# Altium PCB VNA_CHANNEL4.PcbDoc (part 2 of 3)
Units mm, origin at the board's own origin, x right, y up, seen from the top; angles counter-clockwise.
Board outline 32.68 x 75 mm, 4 copper layers (Top Layer, GND, PWR, Bottom Layer), stack 0.758 mm thick; 212 components, 188 nets, 838 pads, 877 vias.
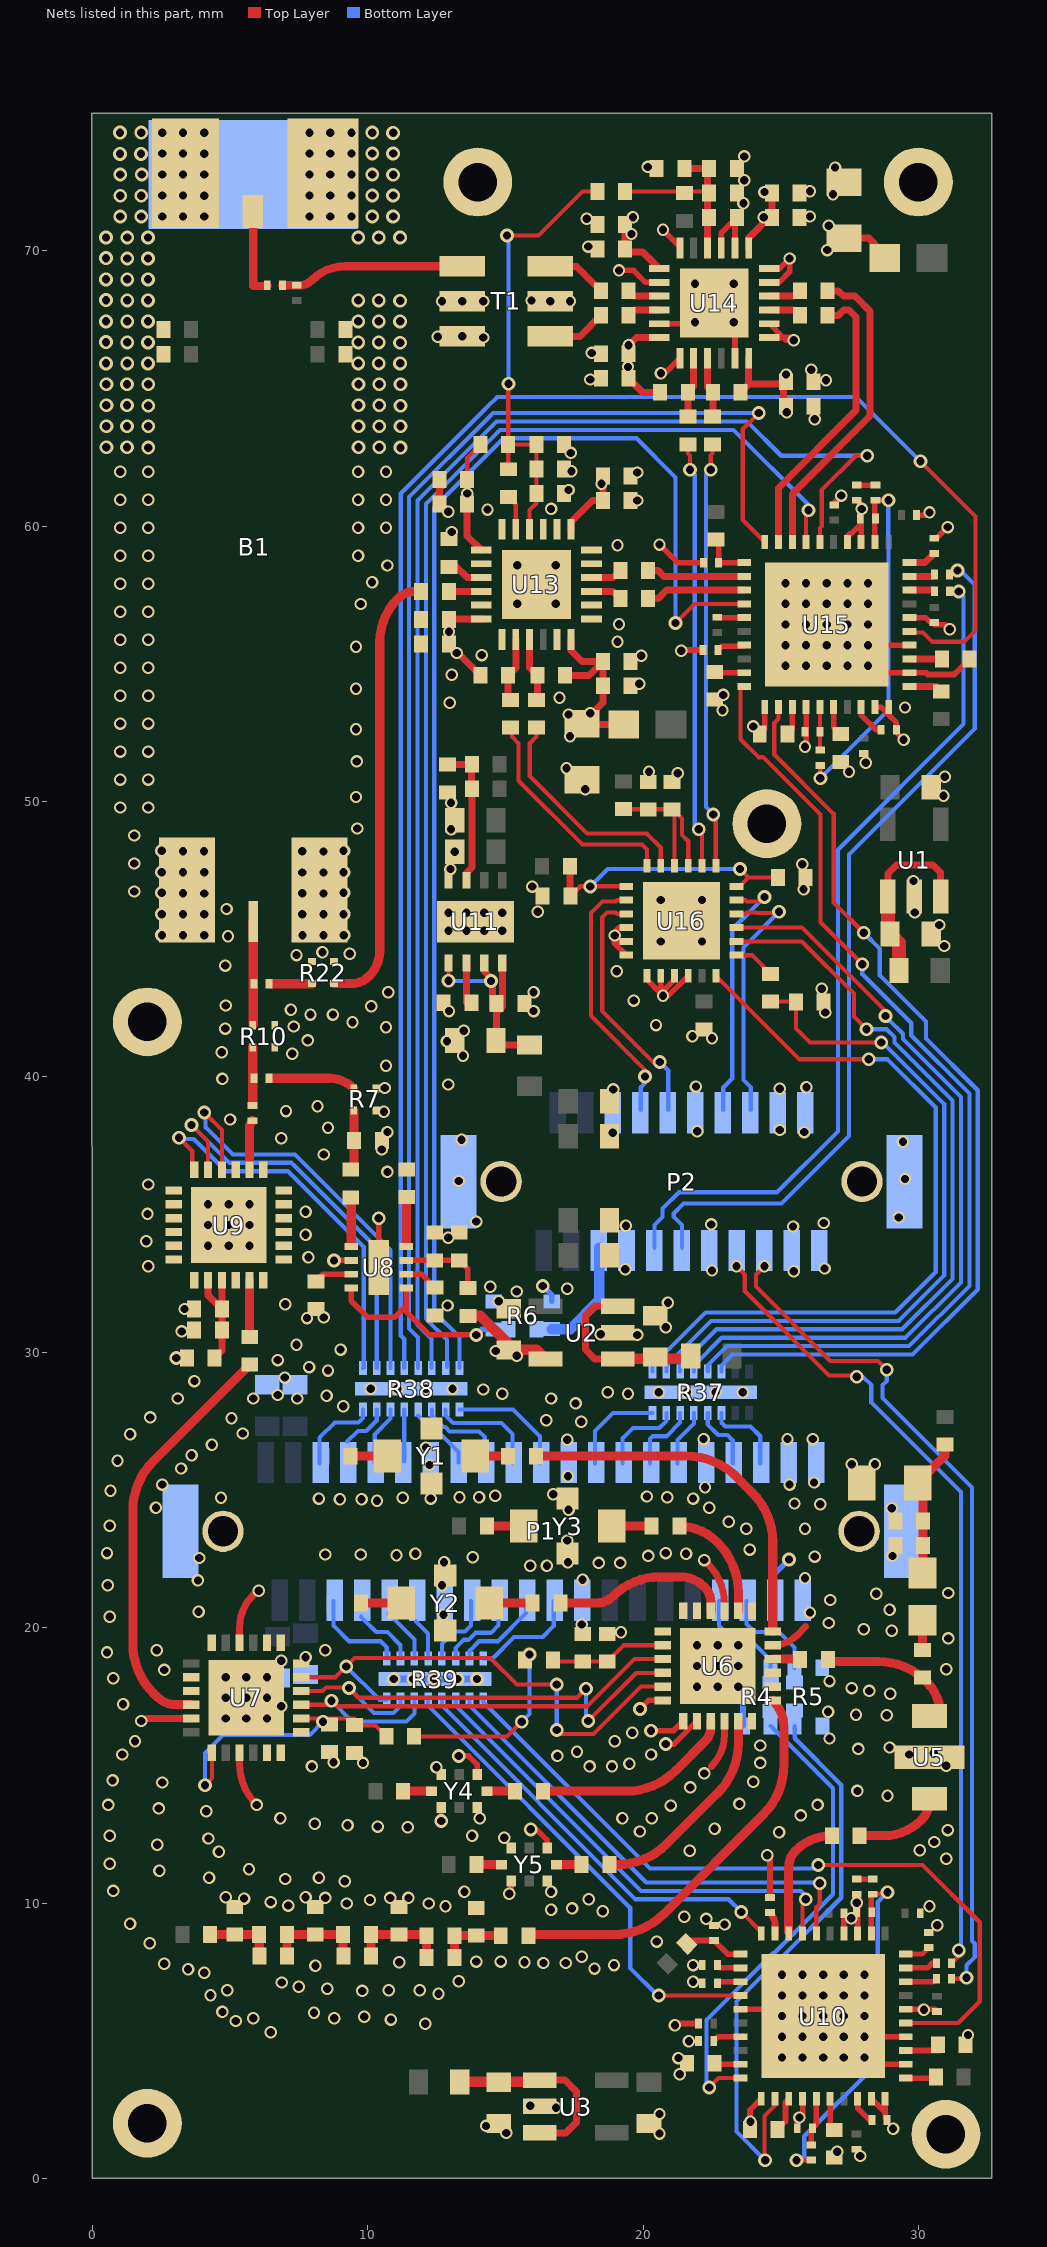
[diagram p4: the nets of this part, all layers, seen from the top]

## Via types
v1: diameter 0.45, hole 0.3, Top Layer to Bottom Layer, tented both sides, 519 vias
v2: diameter 0.5, hole 0.3, Top Layer to Bottom Layer, tented both sides, 143 vias
v3: diameter 0.5, hole 0.305, Top Layer to Bottom Layer, tented both sides, 140 vias
v4: diameter 0.45, hole 0.3, Top Layer to Bottom Layer, 67 vias
v5: diameter 0.508, hole 0.305, Top Layer to Bottom Layer, tented both sides, 8 vias

## Nets (pads, with @x,y where several pads share a name; then routed paths per layer and width w, separated by ;. In a path a pad name is that pad's centre, name@x,y a point inside that pad or via, vN(x,y) a via of type N, cw(c..) or ccw(c..) an arc to the next point about the centre after c; other vN are vias at no path point) (continued)
GND: B1.GND C1.1 C2.1 C3.1 C4.1 C5.1 C6.1 C7.1 C8.1 C9.1 C10.1 C11.1 C12.1 C13.1 C14.1 C15.1 C17.2 C18.2 C22.1 C27.1 C32.1 C36.1 C37.1 C38.1 C40.1 C41.1 C42.1 C44.1 C45.1 C46.2 C48.1 C49.1 C50.1 C52.1 C53.1 C55.1 C56.1 C57.2 C58.2 C59.2 C60.2 C61.2 C62.2 C63.2 C64.2 C66.2 C70.1 C79.1 C80.1 C81.1 C82.1 C83.1 C84.1 C85.1 C86.1 C87.1 C88.1 C89.1 C90.1 C91.1 C92.1 C93.1 C94.1 C95.1 C96.1 C97.1 C98.1 C99.1 C100.1 C101.1 C102.1 C103.1 C105.1 C106.1 C108.1 C109.1 C110.2 C111.2 C112.2 C113.2 C114.2 C115.2 C116.2 C117.2 C118.2 C119.1 C120.1 C122.1 C123.1 C124.1 C125.1 C126.1 C127.1 C128.1 C129.1 C130.1 FB7.1 FB8.1 FB9.1 P1.0 P1.7 P1.12 P1.17 P1.20 P1.21 P1.22 P1.23 P1.30 P1.35 P2.0 P2.1 P2.2 P2.5 P2.8 P2.14 P2.17 P2.20 P2.21 pad.1 R4.3 R5.3 R6.3 R7.1 R7.2 R8.2 R10.1 R10.2 R11.2 R17.1 R19.1 R22.1 R22.2 R25.1 R26.2 R35.2 R37.0 R38.0 R39.0 T1.1 T1.2 T1.5 U1.2 U2.2 U3.2 U5.2 U6.0 U6.1 U6.3 U6.5 U6.6 U6.7 U6.12 U6.13 U6.14 U6.16 U6.18 U6.20 U6.21 U6.23 U7.0 U7.3 U7.5 U7.6 U7.7 U7.12 U7.13 U7.14 U7.16 U7.18 U7.20 U7.21 U7.23 U8.0 U8.2 U9.0 U9.1 U9.4 U9.6 U9.7 U9.8 U9.9 U9.10 U9.11 U9.12 U9.13 U9.15 U9.19 U9.20 U9.21 U9.22 U9.23 U9.24 U10.0 U10.2 U10.4 U10.6 U10.13 U10.14 U10.25 U10.31 U10.34 U10.39 U10.40 U11.0 U11.4 U13.0 U13.1 U13.2 U13.5 U13.6 U13.8 U13.9 U13.12 U13.14 U13.17 U13.19 U13.23 U14.0 U14.1 U14.2 U14.5 U14.6 U14.8 U14.9 U14.12 U14.14 U14.17 U14.19 U14.23 U15.0 U15.2 U15.4 U15.6 U15.13 U15.14 U15.25 U15.31 U15.34 U15.39 U15.40 U16.0 U16.4 U16.5 U16.6 U16.7 U16.8 U16.9 U16.10 Y1.3 Y1.4 Y2.3 Y2.4 Y3.3 Y3.4 Y4.1 Y4.3 Y4.5 Y4.7 Y5.1 Y5.3 Y5.5 Y5.7 | length 82.1
  Top Layer w0.203: v2(8.776,33.337) U8.2@9.405,33.337 ; U8.0@10.405,33.087 v2(10.405,34.865) ; v2(12.676,12.978) Y4.1@12.676,13.462 ; v2(13.309,15.342) 13.665,15.342 13.976,15.031 Y4.5@13.976,14.662 ; v1@15.216,10.416 Y5.1@15.216,10.795 ; v2(15.926,12.675) 16.129,12.675 16.516,12.287 Y5.5@16.516,11.995 ; v1(19.126,69.291) 19.659,69.291 20.095,68.856 U14.14@20.59,68.856 ; U16.6@19.394,44.423 18.948,44.868 v1@18.948,45.085 ; U16.5@19.394,44.923 19.111,44.923 v1@18.948,45.085 ; U16.4@19.394,45.423 19.133,45.423 18.974,45.263 v1(18.974,45.136) 18.974,45.11 v1@18.948,45.085 ; v2(19.888,17.043) 20.203,17.359 U6.12@20.712,17.359 ; U16.7@20.144,43.673 20.144,43.534 v1@20.644,43.034 ; v2(20.294,16.256) 21.109,16.256 U6.13@21.462,16.609 ; U14.17@20.59,67.356 U14.0@21.84,67.356 ; v1(20.599,59.334) 21.255,58.679 C111.2@22.198,58.679 ; U16.8@20.644,43.673 v1@20.644,43.034 ; v1(20.65,65.557) 20.792,65.557 U14.19@21.34,66.106 ; v1(20.726,70.764) 21.34,70.151 U14.12@21.34,70.106 ; v2(20.828,15.773) 21.127,15.773 U6.14@21.962,16.609 ; U16.9@21.144,43.673 21.144,43.534 v1@20.644,43.034 ; v1@21.222,5.626 C63.2@22.018,5.626 ; v1@21.417,55.504 C108.1@22.172,55.504 ; U16.10@21.644,43.673 20.923,42.951 v1(20.726,42.951) v1@20.644,43.034 ; C118.2@22.714,56.681 U15.25@23.673,56.681 ; U14.9@22.84,70.106 22.84,70.65 R19.1@23.34,71.15 ; U14.23@23.34,66.106 U14.0@23.34,67.356 ; U14.8@23.34,70.106 R19.1@23.34,71.15 ; R19.1@23.406,71.216 R19.1@23.34,71.15 ; U10.25@23.544,6.143 U10.0@26.294,6.143 ; C56.1@23.884,1.778 23.884,2.482 U10.31@24.294,2.893 ; C109.1@24.239,52.451 24.423,52.635 U15.31@24.423,53.431 ; U14.1@24.59,66.856 25.09,66.856 ; U14.2@24.59,67.356 25.09,66.856 ; U14.5@24.59,68.856 24.939,68.856 25.324,69.24 v1(25.324,69.723) 24.956,69.356 U14.6@24.59,69.356 ; FB7.1@24.612,10.206 v1@24.612,11.633 ; v1@25.372,66.856 25.09,66.856 ; v1(25.476,66.751) 25.194,66.751 25.09,66.856 ; C62.2@25.6,1.816 25.6,2.13 v1(25.679,2.21) 25.794,2.325 U10.34@25.794,2.893 ; v1(25.882,51.994) 25.923,52.034 U15.34@25.923,53.431 ; C114.2@26.949,60.778 26.949,60.858 v1(27.203,61.112) ; v2(27.294,5.143) v2(28.044,5.143) U10.4@29.544,5.143 ; U10.14@27.294,8.893 C60.2@27.294,9.62 ; v2(27.423,55.681) v2(28.173,55.681) U15.4@29.673,55.681 ; U15.14@27.423,59.431 27.423,59.639 27.508,59.724 27.56,59.724 27.887,60.051 ; C112.2@27.756,60.944 27.923,60.777 U15.13@27.923,59.431 ; C59.2@27.762,10.317 27.794,10.285 U10.13@27.794,8.893 ; U10.39@28.294,2.893 28.794,2.393 ; U10.0@28.294,4.143 U10.2@29.544,4.143 ; U15.39@28.423,53.431 28.636,53.431 28.923,53.144 ; U15.0@28.423,54.681 U15.2@29.673,54.681 30.271,54.681 ; C50.1@28.794,2.194 28.794,2.393 ; U10.40@28.794,2.893 28.794,2.393 ; U15.40@28.923,53.431 28.923,53.144 ; v1(29.464,52.248) 29.199,52.512 C103.1@29.199,52.608 29.199,52.868 28.923,53.144 ; U10.6@29.544,6.143 30.595,6.143 C61.2@30.675,6.062 ; U15.6@29.673,56.681 30.263,56.681 30.445,56.499 C116.2@30.575,56.499 30.575,56.417 30.984,56.417 v1(31.14,56.261) ; C113.2@29.936,60.406 v1@30.307,60.406 ; 30.282,54.681 30.348,54.615 31.304,54.615 C106.1@31.863,55.174 ; C101.1@30.575,59.563 30.658,59.563 v1(31.064,59.969)
  Top Layer w0.254: v1(1.778,16.612) cw(c1.997,16.393) 1.997,16.702 U7.23@3.592,16.702 ; U7.3@5.342,15.452 5.342,15.076 ccw(c7.481,15.076) v1(5.969,13.564) ; U7.16@5.342,19.452 5.342,19.978 cw(c7.047,19.978) 5.842,21.184 5.994,21.336 v1(6.045,21.336) ; C89.1@12.606,61.697 12.606,60.85 v1(12.928,60.528) ; v1@22.352,22.327 cw(c20.878,20.853) 22.962,20.853 U6.3@22.962,20.609 ; 22.479,14.961 ccw(c21.312,16.127) 22.962,16.127 U6.16@22.962,16.609 ; U6.23@24.712,19.359 ccw(c24.712,20.599) 25.589,19.722 25.908,20.041
  Bottom Layer w0.203: v2(16.357,32.41) 16.688,32.08 R6.3@16.688,31.852 ; v1(23.462,17.859) 23.63,17.691 R4.3@23.63,16.434 ; P1.23@24.756,20.97 24.756,21.937 v2(25.298,22.479)
  Bottom Layer w0.254: v2(10.947,18.136) v2(11.658,18.136) v2(12.42,18.136) R39.0@12.446,18.136 v2(13.259,18.136) v2(13.97,18.136)
  other v1: 27.889,0.813 27.051,0.965 20.599,1.626 15.037,1.651 29.083,1.803 14.3,1.905 23.901,2.057 20.599,2.337 16.84,2.565 15.9,2.642 21.336,3.785 21.285,4.369 21.666,4.978 31.801,5.207 6.477,5.309 21.158,5.563 12.09,5.613 5.207,5.715 10.846,5.766 5.842,5.817 8.788,5.817 9.88,5.867 8.052,6.02 4.724,6.045 30.2,6.121 4.292,6.655 12.573,6.706 21.818,7.137 13.31,7.163 4.064,7.468 3.48,7.595 18.237,7.62 18.948,7.747 21.818,7.747 2.616,7.798 16.383,7.823 17.196,7.823 15.697,7.849 13.944,7.874 14.833,7.874 17.78,8.052 2.083,8.534 30.683,9.195 22.961,9.22 1.371,9.246 22.301,9.423 27.559,9.449 18.542,9.703 16.662,9.754 17.424,9.804 12.827,9.881 30.404,9.881 7.112,9.906 9.245,9.982 12.217,9.982 27.762,10.008 6.477,10.033 10.084,10.109 18.034,10.135 5.512,10.16 8.458,10.185 10.82,10.185 11.481,10.185 4.851,10.211 7.747,10.211 15.138,10.338 13.513,10.414 16.662,10.414 0.762,10.439 9.169,10.795 7.01,10.871 4.242,10.922 8.229,10.922 2.438,11.176 5.689,11.227 0.635,11.43 31.013,11.608 24.511,11.735 4.597,11.862 30.048,11.913 2.362,12.116 30.581,12.217 4.216,12.344 14.96,12.37 0.635,12.446 13.792,12.446 24.943,12.573 19.888,12.598 31.064,12.649 11.455,12.751 10.363,12.776 9.271,12.827 8.077,12.878 6.832,13.081 14.071,13.081 19.253,13.081 20.32,13.081 25.73,13.183 4.14,13.335 2.413,13.437 21.006,13.538 0.584,13.564 26.34,13.564 28.88,13.894 27.787,14.072 21.717,14.199 2.54,14.376 0.736,14.453 22.225,14.707 12.497,14.935 7.975,14.961 18.059,14.961 18.872,14.961 31.013,14.986 19.507,15.062 9.83,15.088 24.257,15.088 8.763,15.113 16.891,15.342 1.092,15.392 20.294,15.392 29.667,15.392 30.556,15.443 17.602,15.494 27.813,15.596 28.956,15.646 24.257,15.723 1.549,15.875 18.974,15.875 26.771,15.977 19.609,16.18 4.842,16.702 5.592,16.702 6.342,16.702 28.854,16.815 27.737,16.84 26.721,16.942 1.117,17.221 4.842,17.452 5.592,17.452 6.342,17.452 28.981,17.602 28.219,17.704 27.584,17.805 21.962,17.859 22.712,17.859 26.771,18.059 0.762,18.161 4.842,18.202 5.592,18.202 6.342,18.202 2.616,18.466 31.013,18.491 21.962,18.609 22.712,18.609 23.462,18.609 0.533,19.101 2.337,19.177 8.458,19.177 21.962,19.359 22.712,19.359 23.462,19.359 31.089,19.609 19.202,19.837 29.032,19.888 28.016,19.939 17.78,20.117 26.746,20.168 0.635,20.396 12.751,20.472 26.06,20.549 3.861,20.574 28.956,20.65 26.797,21.006 28.473,21.234 31.089,21.26 0.559,21.539 12.7,21.539 3.835,21.717 17.805,21.742 25.882,21.793 15.9,22.25 16.51,22.25 18.389,22.352 19.177,22.352 12.776,22.377 17.272,22.377 22.225,22.454 3.886,22.53 13.817,22.555 26.238,22.581 20.193,22.606 29.057,22.606 11.049,22.631 8.458,22.657 9.753,22.657 11.735,22.682 21.564,22.682 0.533,22.708 20.828,22.708 23.876,22.835 17.246,23.165 23.749,23.597 25.882,23.597 0.635,23.698 23.114,23.851 17.297,24.282 29.032,24.333 2.311,24.359 22.403,24.359 26.441,24.486 25.501,24.511 10.338,24.613 8.991,24.663 9.779,24.663 8.229,24.689 12.293,24.689 21.818,24.689 4.673,24.714 11.277,24.714 13.335,24.74 14.046,24.74 20.879,24.74 20.142,24.765 14.63,24.79 16.738,24.841 0.66,24.968 22.25,25.095 2.54,25.197 25.324,25.197 26.213,25.273 17.272,25.502 3.226,25.781 12.243,25.908 27.584,25.933 28.422,25.933 0.914,26.06 3.607,26.264 12.116,26.543 4.343,26.645 17.246,26.822 22.199,26.848 25.247,26.848 26.162,26.848 1.371,27.026 5.461,27.051 17.754,27.483 16.484,27.534 5.054,27.61 2.108,27.635 9.118,28.042 17.551,28.143 3.099,28.321 7.442,28.321 16.662,28.321 8.509,28.423 14.884,28.499 19.456,28.499 18.72,28.55 20.574,28.55 21.59,28.55 22.631,28.55 23.622,28.55 14.198,28.651 10.109,28.677 11.074,28.677 12.116,28.677 13.081,28.677 3.708,28.956 6.985,29.083 8.56,29.337 9.017,30.099 7.417,30.277 19.786,30.632 18.466,30.658 3.251,30.759 20.828,30.912 7.798,31.242 8.407,31.267 3.353,31.572 12.903,31.699 7.01,31.75 20.904,31.801 14.757,31.852 15.418,32.207 17.246,32.309 14.452,32.385 25.476,32.944 22.504,32.969 19.355,33.02 26.594,33.045 2.032,33.122 7.848,33.452 4.206,33.873 4.956,33.873 5.706,33.873 1.956,34.036 12.928,34.163 7.747,34.265 25.451,34.569 19.38,34.595 4.206,34.623 4.956,34.623 5.706,34.623 22.479,34.646 26.568,34.696 13.944,34.747 29.286,34.9 2.006,35.027 7.747,35.103 4.206,35.373 4.956,35.373 5.706,35.373 2.032,36.093 13.309,36.22 29.516,36.297 10.719,36.551 8.407,37.186 10.515,37.363 29.438,37.643 13.411,37.719 6.858,37.77 18.897,37.973 10.719,37.998 25.857,37.998 21.971,38.024 24.968,38.075 8.56,38.151 5.004,38.456 10.592,38.735 7.036,38.76 8.179,38.938 18.923,39.548 24.968,39.573 10.617,39.599 25.933,39.624 21.92,39.649 12.928,39.726 4.724,39.929 10.668,40.411 13.462,40.767 7.264,40.843 4.699,40.894 12.878,41.3 7.823,41.326 22.504,41.402 21.793,41.478 13.487,41.681 4.826,41.758 10.668,41.808 7.315,41.834 20.472,41.885 9.449,41.986 7.925,42.266 8.737,42.266 26.619,42.342 12.954,42.393 16.027,42.393 7.213,42.443 10.134,42.57 4.851,42.596 19.659,42.774 10.744,43.078 16.027,43.078 26.492,43.205 19.05,43.84 4.826,44.044 7.417,44.425 9.347,44.475 8.356,44.526 30.937,44.755 20.644,44.923 22.144,44.923 4.927,45.11 30.759,45.517 29.87,45.974 16.18,45.999 4.877,46.101 20.644,46.423 22.144,46.423 25.832,46.812 15.976,46.914 29.819,47.117 13.005,47.549 25.781,47.727 13.164,48.179 13.03,48.997 9.626,49.022 13.03,49.962 9.576,50.165 30.912,50.216 17.907,50.444 30.962,50.902 21.26,51.029 20.218,51.079 27.483,51.079 17.221,51.206 28.092,51.41 9.601,51.46 9.576,52.629 24.003,52.73 22.885,53.315 29.515,53.416 12.979,53.594 16.967,53.772 22.911,53.873 9.576,54.102 19.863,54.28 13.055,54.61 19.939,55.296 14.148,55.321 21.387,55.474 9.576,55.626 19.075,55.804 19.126,56.439 9.753,57.175 10.16,57.963 10.719,58.572 19.075,59.309 13.055,59.792 30.404,60.503 14.351,60.604 16.662,60.63 27.94,60.63 19.786,60.935 17.297,61.316 19.786,61.951 17.399,62.001 17.373,62.662 26.238,63.881 26.644,65.303 18.085,65.329 26.111,65.684 18.135,66.294 14.198,66.853 12.547,66.878 13.432,66.898 12.7,68.174 13.432,68.168 14.198,68.174 16.632,68.168 17.348,68.174 15.951,68.199 18.008,70.155 17.958,71.171 26.06,71.247 23.647,71.73 26.898,72.06 26.06,72.161 23.673,72.568 26.975,73.025 23.673,73.431
  other v2: 25.044,4.393 25.794,4.393 26.544,4.393 27.294,4.393 28.044,4.393 25.044,5.143 25.794,5.143 26.544,5.143 25.044,5.893 25.794,5.893 26.544,5.893 27.294,5.893 28.044,5.893 25.044,6.643 25.794,6.643 26.544,6.643 27.294,6.643 28.044,6.643 25.044,7.393 25.794,7.393 26.544,7.393 27.294,7.393 28.044,7.393 12.939,45.314 13.589,45.314 14.239,45.314 14.889,45.314 12.939,45.964 13.589,45.964 14.239,45.964 14.889,45.964 25.173,54.931 25.923,54.931 26.673,54.931 27.423,54.931 28.173,54.931 25.173,55.681 25.923,55.681 26.673,55.681 25.173,56.431 25.923,56.431 26.673,56.431 27.423,56.431 28.173,56.431 25.173,57.181 25.923,57.181 26.673,57.181 27.423,57.181 28.173,57.181 25.173,57.931 25.923,57.931 26.673,57.931 27.423,57.931 28.173,57.931
  other v3: 2.531,45.152 3.293,45.152 4.067,45.14 7.635,45.14 8.397,45.14 9.135,45.152 2.519,45.914 3.293,45.914 4.067,45.914 7.623,45.902 8.397,45.902 9.123,45.914 3.293,46.676 4.067,46.664 7.623,46.676 8.397,46.664 2.519,46.688 9.123,46.688 2.519,47.438 3.293,47.438 4.067,47.438 7.623,47.426 8.397,47.426 9.123,47.438 3.293,48.2 4.055,48.2 7.623,48.2 8.397,48.188 2.519,48.212 9.123,48.212 2.035,62.855 11.191,62.855 0.511,62.867 1.261,62.867 9.667,62.867 10.417,62.867 0.511,63.629 1.261,63.629 2.035,63.629 9.667,63.629 10.417,63.629 11.191,63.629 2.035,64.379 11.191,64.379 0.511,64.391 1.261,64.391 9.667,64.391 10.417,64.391 0.511,65.153 1.261,65.153 2.035,65.153 9.667,65.153 10.417,65.153 11.191,65.153 0.499,65.915 1.273,65.915 2.023,65.915 9.655,65.915 10.405,65.915 11.179,65.915 11.179,66.665 0.499,66.689 1.273,66.677 2.023,66.677 9.655,66.677 10.405,66.677 0.499,67.439 1.273,67.439 2.023,67.439 9.655,67.439 10.405,67.439 11.179,67.439 11.179,68.189 0.499,68.213 1.273,68.201 2.023,68.201 9.655,68.201 10.405,68.201 0.499,68.963 1.273,68.963 2.023,68.963 0.499,69.737 1.273,69.725 2.023,69.725 0.499,70.487 1.273,70.487 2.023,70.487 9.655,70.487 10.405,70.487 11.179,70.487 1.019,71.249 1.781,71.249 2.543,71.249 3.293,71.249 4.067,71.249 7.889,71.249 8.639,71.249 9.413,71.249 10.163,71.249 10.925,71.249 1.019,71.999 1.781,71.999 4.067,71.999 2.543,72.011 3.293,72.011 7.889,72.011 8.639,72.011 9.413,72.011 10.163,72.011 10.925,72.011 10.925,72.761 1.019,72.773 1.793,72.773 2.543,72.773 3.293,72.773 4.067,72.773 7.889,72.773 8.639,72.773 9.413,72.773 10.163,72.773 1.007,73.523 1.769,73.523 4.067,73.523 2.543,73.535 3.293,73.535 7.889,73.535 8.639,73.535 9.413,73.535 10.163,73.535 10.925,73.535 10.925,74.285 1.007,74.297 1.781,74.297 2.543,74.297 3.293,74.297 4.067,74.297 7.889,74.297 8.639,74.297 9.413,74.297 10.163,74.297
  other v4: 9.804,6.807 4.902,6.833 10.77,6.833 11.887,6.833 8.534,6.883 7.493,6.96 6.883,7.112 8.103,7.722 11.151,7.849 20.5,8.6 21.5,9.5 21.7,11.9 22.6,12.7 23.5,13.6 24,14.4 6.858,17.145 6.858,18.796 7.747,18.923 5.842,28.321 6.731,28.448 7.874,29.464 6.731,29.718 1.524,46.736 1.524,47.752 1.524,48.768 1.016,49.784 2.032,49.784 1.016,50.8 2.032,50.8 1.016,51.816 2.032,51.816 1.016,52.832 2.032,52.832 1.016,53.848 2.032,53.848 1.016,54.864 2.032,54.864 1.016,55.88 2.032,55.88 1.016,56.896 2.032,56.896 1.016,57.912 2.032,57.912 1.016,58.928 2.032,58.928 9.652,58.928 1.016,59.944 2.032,59.944 9.652,59.944 10.668,59.944 1.016,60.96 2.032,60.96 9.652,60.96 10.668,60.96 1.016,61.976 2.032,61.976 9.652,61.976 10.668,61.976
  other v5: 15.429,57.187 16.829,57.187 15.429,58.587 16.829,58.587 21.89,67.406 23.29,67.406 21.89,68.806 23.29,68.806
LO1_N: C74.1 U15.18 | length 11.4
  Top Layer w0.254: U15.18@25.423,59.431 25.423,61.179 28.245,64.001 28.245,67.807 27.693,68.358 27.279,68.358 27.089,68.549 C74.1@26.708,68.549
LO1_P: C73.1 U15.19 | length 10.5
  Top Layer w0.254: U15.19@24.915,59.431 24.915,61.39 27.737,64.211 27.737,67.596 27.483,67.85 27.279,67.85 27.089,67.66 C73.1@26.708,67.66
LO2_N: C69.1 U15.22 | length 3.6
  Top Layer w0.254: C69.1@20.185,58.395 20.553,58.395 20.767,58.181 U15.22@23.673,58.181
LO2_P: C68.1 U15.23 | length 3.6
  Top Layer w0.254: C68.1@20.185,57.379 20.553,57.379 20.855,57.681 U15.23@23.673,57.681
LO_REF_N: C107.1 P2.6 | length 31.6
  Bottom Layer w0.152: P2.6@21.416,33.797 21.416,34.623 21.119,34.92 21.119,35.052 21.475,35.408 25.035,35.408 27.483,37.855 27.483,48.082 32.051,52.65 32.051,57.873 v2@31.474,58.449
  other v2: 31.42,58.395
LO_REF_P: C104.1 P2.7 | length 30.6
  Bottom Layer w0.152: P2.7@20.416,33.797 20.416,34.623 20.713,34.92 20.713,35.22 21.306,35.814 24.866,35.814 27.076,38.024 27.076,48.251 31.644,52.819 31.644,57.459 v2@31.492,57.611
  other v2: 31.47,57.633
NetB1_COUPLE: B1.COUPLE T1.3 | length 6.2
  Top Layer w0.305: B1.COUPLE@7.43,68.75 7.527,68.75 ccw(c7.527,69.384) 7.976,68.936 cw(c9.188,67.723) 9.188,69.438 T1.3@13.432,69.438
NetB1_OUT: B1.OUT
NetB1_SOURCE: B1.SOURCE R10.3 R33.2 | length 3.7
  Top Layer w0.33: R10.3@5.845,41.9 B1.SOURCE@5.845,45.648
NetC1_2: C1.2 R1.1 U1.1 U1.3 | length 6.7
  Top Layer w0.254: U1.1@28.895,46.553 28.895,47.386 29.21,47.701 30.531,47.701 30.81,47.422 U1.3@30.81,46.553
  Top Layer w0.508: U1.1@28.895,46.553 28.895,45.26 C1.2@28.968,45.187 29.298,44.856 R1.1@29.298,43.866
NetC2_2: C2.2 R2.1 U2.1 U2.3 | length 6.4
  Top Layer w0.254: U2.1@19.08,29.759 18.247,29.759 17.907,30.099 17.907,31.344 18.237,31.674 U2.3@19.08,31.674
  Top Layer w0.381: U2.1@19.08,29.759 R2.1@21.617,29.759
NetC3_2: C3.2 R3.1 U3.1 U3.3 | length 6.9
  Top Layer w0.254: U3.3@16.251,1.651 17.196,1.651 17.577,2.032 17.577,3.15 17.16,3.566 U3.1@16.251,3.566
  Top Layer w0.381: R3.1@13.348,3.505 U3.1@16.19,3.505
NetC13_2: C13.2 C14.2 C15.2 FB1.2 L4.1 | length 4.8
  Top Layer w0.33: C13.2@29.972,25.248 30.962,26.238 FB1.2@30.962,26.645 ; L4.1@30.175,22.008 C14.2@30.175,22.987 C15.2@30.175,23.876 C13.2@30.175,25.044
NetC16_1: C16.1 L1.2 U5.3 | length 5.2
  Top Layer w0.33: C16.1@26.662,18.771 28.54,18.771 cw(c28.54,16.296) 30.29,18.046 cw(c29.035,16.791) U5.3@30.81,16.791
NetC16_2: C16.2 U6.22 | length 1
  Top Layer w0.33: U6.22@24.712,18.859 25.441,18.859 cw(c25.441,18.558) C16.2@25.654,18.771
NetC17_1: C17.1 C18.1 FB2.1 U6.8 | length 4.1
  Top Layer w0.152: FB2.1@16.845,18.795 16.87,18.769 C18.1@17.81,18.769 C17.1@18.699,18.769 19.288,19.359 U6.8@20.712,19.359
NetC19_1: C19.1 U6.19 | length 14.6
  Top Layer w0.33: C19.1@15.9,8.855 18.953,8.855 ccw(c18.953,11.395) 20.75,9.599 24.376,13.226 ccw(c22.58,15.022) 25.12,15.022 25.12,16.373 ccw(c23.726,16.373) U6.19@24.712,17.359
NetC19_2: C19.2 C22.2 C26.1 L2.1 | length 2.5
  Top Layer w0.33: L2.1@13.149,8.026 C26.1@13.149,8.814 C22.2@13.945,8.814 C19.2@14.834,8.814
NetC20_1: C20.1 U6.15 | length 7.3
  Top Layer w0.33: C20.1@16.366,14.062 19.385,14.062 ccw(c19.385,16.602) 21.181,14.806 22.27,15.895 ccw(c21.806,16.358) 22.462,16.358 ccw(c21.479,16.367) 22.462,16.367 22.462,16.407 ccw(c21.478,16.418) 22.462,16.418 U6.15@22.462,16.609
NetC20_2: C20.2 Y4.4 | length 1
  Top Layer w0.33: Y4.4@14.326,14.062 C20.2@15.358,14.062
NetC21_1: C21.1 U6.17 | length 7.7
  Top Layer w0.33: C21.1@18.779,11.395 19.055,11.395 ccw(c19.055,13.935) 20.851,12.139 22.718,14.006 ccw(c20.922,15.802) 23.462,15.802 U6.17@23.462,16.609
NetC21_2: C21.2 Y5.4 | length 0.9
  Top Layer w0.33: Y5.4@16.866,11.395 C21.2@17.771,11.395
NetC23_1: C23.1 U6.24 | length 13.5
  Top Layer w0.33: C23.1@16.112,26.229 21.589,26.229 cw(c21.589,23.689) 23.385,25.485 23.968,24.901 cw(c22.172,23.105) 24.712,23.105 U6.24@24.712,19.859
NetC23_2: C23.2 Y1.1 | length 1.2
  Top Layer w0.33: Y1.1@13.91,26.229 C23.2@15.104,26.229
NetC24_1: C24.1 U6.4 | length 6.5
  Top Layer w0.33: C24.1@17.001,20.895 18.323,20.895 ccw(c18.323,21.707) 18.897,21.133 cw(c20.614,19.416) 20.614,21.844 21.354,21.844 cw(c21.354,20.601) 22.233,21.48 cw(c21.68,20.927) 22.462,20.927 U6.4@22.462,20.609
NetC24_2: C24.2 Y2.1 | length 1.6
  Top Layer w0.33: Y2.1@14.418,20.895 C24.2@15.993,20.895
NetC25_1: C25.1 U6.2 | length 4.2
  Top Layer w0.33: C25.1@21.319,23.689 cw(c21.319,21.786) 22.665,23.131 22.719,23.077 cw(c20.923,21.281) 23.463,21.281 23.463,20.734 ccw(c23.573,20.724) 23.462,20.724 U6.2@23.462,20.609
NetC25_2: C25.2 Y3.1 | length 1.4
  Top Layer w0.33: Y3.1@18.863,23.689 C25.2@20.311,23.689
NetC26_2: C26.2 C130.2 C131.1 L2.2 L5.1 | length 3.6
  Top Layer w0.33: L5.1@10.118,8.086 C131.1@10.118,8.855 C130.2@11.142,8.855 C26.2@12.158,8.855 ; L2.2@12.141,8.026 C26.2@12.141,8.814
NetC27_2: C27.2 C28.1 C131.2 L3.1 L5.2 | length 3.6
  Top Layer w0.33: L3.1@7.07,8.086 C28.1@7.07,8.855 C27.2@8.094,8.855 C131.2@9.11,8.855 L5.2@9.11,8.086
NetC28_2: C28.2 C32.2 C35.1 L3.2 | length 2.6
  Top Layer w0.33: C35.1@4.276,8.855 C32.2@5.173,8.855 C28.2@6.062,8.855 L3.2@6.062,8.086
NetC29_1: C29.1 Y1.2 | length 1.3
  Top Layer w0.33: C29.1@9.381,26.229 Y1.2@10.71,26.229
NetC30_1: C30.1 Y2.2 | length 1.5
  Top Layer w0.33: C30.1@9.762,20.895 Y2.2@11.218,20.895
NetC31_1: C31.1 Y3.2 | length 1.3
  Top Layer w0.33: C31.1@14.334,23.689 Y3.2@15.663,23.689
NetC33_1: C33.1 Y4.8 | length 1
  Top Layer w0.33: C33.1@11.286,14.062 Y4.8@12.326,14.062
NetC34_1: C34.1 Y5.8 | length 0.9
  Top Layer w0.33: C34.1@13.953,11.395 Y5.8@14.866,11.395
NetC36_2: C36.2 C119.2 R34.1 U11.5 U11.7 U11.8 | length 7.9
  Top Layer w0.152: v2(12.939,43.495) U11.5@12.939,44.139
  Top Layer w0.254: U11.7@14.239,44.139 14.239,43.825 14.529,43.536 C119.2@14.529,42.484 ; C36.2@14.676,41.333 14.676,42.337 14.889,42.55 U11.8@14.889,44.139 ; C36.2@14.823,41.161 R34.1@15.875,41.161
  Bottom Layer w0.152: v2(12.939,43.495) 12.949,43.485 v2(14.478,43.485)
NetC37_2: C37.2 C38.2 FB3.1 U7.1 U7.8 | length 10.8
  Top Layer w0.152: v2(4.089,14.275) 4.342,14.528 U7.1@4.342,15.452 ; U7.8@7.592,16.702 9.517,16.702 C38.2@9.757,16.463 ; C38.2@9.525,16.459 10.269,16.459 FB3.1@10.676,16.053
  Bottom Layer w0.152: v2(4.089,14.275) 4.089,15.443 4.75,16.104 7.899,16.104 v2(8.382,16.586)
NetC39_1: C39.1 U7.22 | length 15.3
  Top Layer w0.33: U7.22@3.592,17.202 3.029,17.202 cw(c3.029,18.154) 2.356,17.481 2.217,17.62 cw(c4.013,19.416) 1.473,19.416 1.473,24.254 cw(c4.013,24.254) 2.217,26.05 C39.1@5.718,29.551
NetC39_2: C39.2 U9.5 | length 2.1
  Top Layer w0.33: C39.2@5.706,30.571 U9.5@5.706,32.623
NetC40_2: C40.2 U8.3 | length 1.4
  Top Layer w0.203: C40.2@8.119,32.579 8.377,32.837 8.563,32.837 8.567,32.833 9.401,32.833 U8.3@9.405,32.837
NetC41_2: C41.2 C42.2 FB4.1 U9.2 U9.3 | length 4.2
  Top Layer w0.254: U9.2@4.206,32.623 4.206,32.071 C42.2@4.702,31.575 C41.2@4.702,30.813 4.702,30.059 FB4.1@4.44,29.797 ; C42.2@4.706,31.579 U9.3@4.706,32.623
NetC43_1: C43.1 R7.4 R8.1 | length 2.2
  Top Layer w0.33: C43.1@9.389,36.635 ccw(c9.128,36.895) 9.497,36.895 R7.4@9.497,38.783
NetC43_2: C43.2 U8.1 | length 1.7
  Top Layer w0.33: C43.2@9.389,35.627 cw(c9.35,35.588) 9.405,35.588 U8.1@9.405,33.909
NetC44_2: C44.2 C45.2 FB5.2 U8.7 | length 3.1
  Top Layer w0.203: U8.7@11.405,33.337 C44.2@13.322,33.337 ; C44.2@13.326,33.341 13.64,33.027 FB5.2@13.64,32.334
NetC46_1: C46.1 U8.8 | length 1.7
  Top Layer w0.33: U8.8@11.405,33.909 11.405,35.596 cw(c11.46,35.596) C46.1@11.421,35.635
NetC47_1: C47.1 U9.14 | length 1.8
  Top Layer w0.33: U9.14@5.706,36.623 5.706,38.142 cw(c6.083,38.142) C47.1@5.817,38.409
NetC47_2: C47.2 R9.1 R10.4 | length 2
  Top Layer w0.33: C47.2@5.826,39.049 R10.4@5.826,41.081
NetC48_2: C48.2 U10.10 | length 0.9
  Top Layer w0.178: U10.10@29.544,8.143 30.135,8.143 C48.2@30.378,8.386
NetC49_2: C49.2 U10.36 | length 1
  Top Layer w0.203: C49.2@26.794,1.913 U10.36@26.794,2.893
NetC50_2: C50.2 U10.38 | length 1
  Top Layer w0.203: U10.38@27.794,2.893 27.794,2.553 C50.2@28.227,2.121
NetC51_2: C51.2 U10.8 | length 1.2
  Top Layer w0.203: U10.8@29.544,7.143 30.545,7.143 C51.2@30.654,7.252
NetC52_2: C52.2 U10.29 | length 0.9
  Top Layer w0.203: C52.2@22.634,4.143 U10.29@23.544,4.143
NetC53_2: C53.2 U10.3 | length 1.2
  Top Layer w0.203: U10.3@29.544,4.643 C53.2@30.784,4.643
NetC54_2: C54.2 U10.9 | length 1.2
  Top Layer w0.203: U10.9@29.544,7.643 30.325,7.643 30.493,7.811 C54.2@30.654,7.811
NetC55_2: C55.2 U10.27 | length 1
  Top Layer w0.203: C55.2@22.568,4.991 22.72,5.143 U10.27@23.544,5.143
NetC56_2: C56.2 U10.33 | length 1.3
  Top Layer w0.203: C56.2@24.892,1.778 25.173,2.059 25.173,2.772 U10.33@25.294,2.893
NetC57_1: C57.1 FB10.2 FB11.2 U10.12 | length 13.7
  Top Layer w0.152: v2(25.578,0.66) FB11.2@26.107,0.66 ; FB10.2@28.346,10.317 28.808,10.317 v2(28.88,10.389)
  Top Layer w0.203: U10.12@28.294,8.893 FB10.2@28.294,10.265
  Bottom Layer w0.152: v2(25.578,0.66) 25.654,0.584 25.857,0.787 25.857,1.529 28.523,4.195 28.523,10.032 v2(28.88,10.389)
NetC58_1: C58.1 FB6.2 U10.21 | length 2.2
  Top Layer w0.203: FB6.2@21.593,8.513 21.721,8.64 C58.1@22.58,8.64 23.078,8.143 U10.21@23.544,8.143
NetC59_1: C59.1 FB10.1 | length 0.6
  Top Layer w0.203: C59.1@27.762,10.867 FB10.1@28.346,10.867
NetC62_1: C62.1 FB11.1 U10.35 | length 1.8
  Top Layer w0.203: FB11.1@26.111,1.215 26.111,1.778 C62.1@26.15,1.816 26.294,1.961 U10.35@26.294,2.893
NetC65_1: C65.1 U10.18 | length 4.5
  Top Layer w0.33: U10.18@25.289,8.964 25.289,11.289 cw(c26.161,11.289) 25.545,11.905 ; 25.545,11.905 cw(c26.85,10.599) 26.85,12.446 C65.1@26.856,12.446
NetC65_2: C65.2 U5.1 | length 3.2
  Top Layer w0.33: C65.2@27.864,12.446 28.75,12.446 ccw(c28.75,14.354) 30.099,13.005 ccw(c29.363,13.741) U5.1@30.404,13.741
NetC67_2: C67.2 R30.1 U14.21 | length 2.2
  Top Layer w0.254: U14.21@22.34,66.106 22.34,65.059 R30.1@22.533,64.866 C67.2@22.533,63.985
NetC68_2: C68.2 U13.3 | length 1.2
  Top Layer w0.254: U13.3@18.129,57.637 18.919,57.637 C68.2@19.177,57.379
NetC69_2: C69.2 U13.4 | length 1.2
  Top Layer w0.254: U13.4@18.129,58.137 18.919,58.137 C69.2@19.177,58.395
NetC70_2: C70.2 U13.15 | length 1.3
  Top Layer w0.254: C70.2@12.954,58.522 13.233,58.522 13.618,58.137 U13.15@14.129,58.137
NetC71_1: C71.1 R22.4 | length 16.3
  Top Layer w0.33: R22.4@8.782,43.39 9.399,43.39 ccw(c9.399,44.322) 10.058,43.663 ccw(c9.138,44.582) 10.439,44.582 10.439,55.784 cw(c12.694,55.784) 11.1,57.379 cw(c11.713,56.765) 11.713,57.633 C71.1@11.946,57.633
NetC71_2: C71.2 U13.16 | length 1.2
  Top Layer w0.254: C71.2@12.958,57.637 U13.16@14.129,57.637
NetC72_2: C72.2 R31.1 U13.21 | length 2.3
  Top Layer w0.254: U13.21@15.879,55.887 15.879,54.868 R31.1@16.162,54.585 C72.2@16.162,53.729
NetC73_2: C73.2 U14.3 | length 1.2
  Top Layer w0.254: U14.3@24.59,67.856 25.504,67.856 C73.2@25.7,67.66
NetC74_2: C74.2 U14.4 | length 0.9
  Top Layer w0.254: U14.4@24.59,68.356 C74.2@25.507,68.356
NetC75_1: C75.1 T1.6 | length 2.2
  Top Layer w0.254: T1.6@16.632,66.898 17.706,66.898 C75.1@18.474,67.666
NetC75_2: C75.2 U14.16 | length 1.2
  Top Layer w0.254: C75.2@19.482,67.666 19.672,67.856 U14.16@20.59,67.856
NetC76_1: C76.1 T1.4 | length 2.2
  Top Layer w0.254: T1.4@16.632,69.438 17.58,69.438 C76.1@18.469,68.549
NetC76_2: C76.2 U14.15 | length 1.2
  Top Layer w0.254: C76.2@19.477,68.549 19.67,68.356 U14.15@20.59,68.356
NetC77_2: C77.2 R28.1 U14.20 | length 2.2
  Top Layer w0.254: C77.2@21.628,63.985 R28.1@21.628,64.866 21.84,65.078 U14.20@21.84,66.106
NetC78_2: C78.2 R29.1 U13.20 | length 2.2
  Top Layer w0.254: C78.2@15.105,53.78 R29.1@15.105,54.585 15.379,54.859 U13.20@15.379,55.887
NetC101_2: C101.2 U15.10 | length 1
  Top Layer w0.254: U15.10@29.673,58.681 30.243,58.681 C101.2@30.575,59.013
NetC102_2: C102.2 U15.36 | length 1.1
  Top Layer w0.203: U15.36@26.923,53.431 26.923,52.706 C102.2@27.178,52.451
NetC103_2: C103.2 U15.38 | length 1.2
  Top Layer w0.203: U15.38@27.923,53.431 27.923,53.148 28.463,52.608 C103.2@28.649,52.608
NetC104_2: C104.2 U15.8 | length 0.9
  Top Layer w0.254: U15.8@29.673,57.681 C104.2@30.536,57.681
NetC105_2: C105.2 U15.29 | length 1
  Top Layer w0.203: C105.2@22.637,54.681 U15.29@23.673,54.681
NetC106_2: C106.2 U15.3 | length 1.2
  Top Layer w0.254: U15.3@29.673,55.181 C106.2@30.848,55.181
NetC107_2: C107.2 U15.9 | length 0.9
  Top Layer w0.254: U15.9@29.673,58.181 30.514,58.181 C107.2@30.58,58.247
NetC108_2: C108.2 U15.27 | length 1
  Top Layer w0.203: C108.2@22.722,55.504 22.858,55.639 23.673,55.639 U15.27@23.673,55.681
NetC109_2: C109.2 U15.33 | length 0.8
  Top Layer w0.203: C109.2@25.423,52.627 U15.33@25.423,53.431
NetC110_1: C110.1 FB13.2 FB14.2 U15.12 | length 13.6
  Top Layer w0.152: FB14.2@26.435,51.317 26.435,50.857 v2(26.441,50.851) ; FB13.2@28.442,60.944 v2(28.914,60.944)
  Top Layer w0.203: U15.12@28.423,59.431 FB13.2@28.423,60.925
  Bottom Layer w0.152: v2(26.441,50.851) 28.914,53.324 28.914,59.664 28.907,59.671 28.907,60.937 v2(28.914,60.944)
NetC111_1: C111.1 FB12.2 U15.21 | length 1.7
  Top Layer w0.203: FB12.2@22.75,59.418 22.75,58.681 U15.21@23.673,58.681
NetC112_1: C112.1 FB13.1 | length 0.7
  Top Layer w0.203: C112.1@27.756,61.494 FB13.1@28.442,61.494
NetC115_1: C115.1 FB14.1 U15.35 | length 1.6
  Top Layer w0.152: FB14.1@26.423,51.879 U15.35@26.423,53.431
NetC120_2: C120.2 U11.6 | length 1.4
  Top Layer w0.254: C120.2@13.589,42.697 U11.6@13.589,44.139
NetC121_2: C121.2 R35.1 R36.2 U11.3 | length 5.2
  Top Layer w0.254: R35.1@12.898,51.346 13.779,51.346 R36.2@13.779,50.473 ; U11.3@13.589,47.139 13.589,47.408 13.793,47.613 13.793,50.458 R36.2@13.787,50.465
NetC122_2: C122.2 C123.2 R23.2 U16.21 U16.22 | length 6
  Top Layer w0.152: R23.2@19.295,49.724 21.073,49.724 C123.2@21.144,49.653 ; U16.22@21.144,47.673 C123.2@21.144,49.653 ; U16.21@21.644,47.673 21.644,48.561 21.412,48.793 21.412,49.385 C123.2@21.144,49.653
NetFB7_2: FB7.2 U10.19 | length 0.8
  Top Layer w0.254: FB7.2@24.612,9.656 cw(c24.173,9.217) 24.794,9.217 U10.19@24.794,8.893
NetFB8_2: FB8.2 U10.22 | length 0.9
  Top Layer w0.203: FB8.2@22.703,7.747 22.807,7.643 U10.22@23.544,7.643
NetFB9_2: FB9.2 U10.23 | length 0.8
  Top Layer w0.203: FB9.2@22.759,7.143 U10.23@23.544,7.143
NetL1_1: L1.1 L4.2 | length 1.1
  Top Layer w0.33: L1.1@30.15,19.194 L4.2@30.15,20.269
NetP1_3: P1.3 R38.16 | length 3.1
  Bottom Layer w0.152: P1.3@8.256,25.97 8.256,26.9 8.807,27.451 9.671,27.451 9.832,27.612 R38.16@9.832,27.927
NetP1_4: P1.4 R38.15 | length 1.8
  Bottom Layer w0.152: 9.256,26.757 9.645,27.146 9.951,27.146 10.332,27.527 R38.15@10.332,27.927
NetP1_5: P1.5 R38.14 | length 2.2
  Bottom Layer w0.152: P1.5@10.256,25.97 10.256,27.02 10.832,27.596 R38.14@10.832,27.927
NetP1_6: P1.6 R38.13 | length 1.9
  Bottom Layer w0.152: P1.6@11.332,26.046 R38.13@11.332,27.927
NetP1_8: P1.8 R38.12 | length 2.4
  Bottom Layer w0.152: R38.12@11.832,27.708 12.562,26.979 12.695,26.979 13.3,26.373 P1.8@13.3,26
NetP1_9: P1.9 R38.11 | length 3.4
  Bottom Layer w0.152: R38.11@12.332,27.927 12.332,27.698 12.746,27.283 12.821,27.283 12.977,27.127 14.046,27.127 14.256,26.917 P1.9@14.256,25.97
NetP1_10: P1.10 R38.10 | length 4
  Bottom Layer w0.152: R38.10@12.832,27.927 12.832,27.706 13.106,27.432 14.859,27.432 15.256,27.035 P1.10@15.256,25.97
NetP1_11: P1.11 R38.9 | length 4.3
  Bottom Layer w0.152: R38.9@13.332,27.927 15.279,27.927 16.256,26.949 P1.11@16.256,25.97
NetP1_13: P1.13 R37.16 | length 3.5
  Bottom Layer w0.152: P1.13@18.256,25.97 18.256,27.146 18.909,27.8 R37.16@20.348,27.8
NetP1_14: P1.14 R37.15 | length 3
  Bottom Layer w0.152: P1.14@19.256,25.97 19.256,26.876 19.634,27.254 20.59,27.254 20.848,27.512 R37.15@20.848,27.8
NetP1_15: P1.15 R37.14 | length 2.6
  Bottom Layer w0.152: P1.15@20.256,25.97 20.256,26.86 20.345,26.949 20.85,26.949 21.348,27.447 R37.14@21.348,27.8
NetP1_16: P1.16 R37.13 | length 2.1
  Bottom Layer w0.152: P1.16@21.256,25.97 21.256,26.819 21.848,27.411 R37.13@21.848,27.8
NetP1_18: P1.18 R37.12 | length 2.4
  Bottom Layer w0.152: R37.12@22.348,27.8 22.348,27.385 22.733,27 23.063,27 23.256,26.807 P1.18@23.256,25.97
NetP1_19: P1.19 R37.11 | length 2.9
  Bottom Layer w0.152: R37.11@22.848,27.8 22.848,27.444 22.987,27.305 23.901,27.305 24.256,26.95 P1.19@24.256,25.97
NetP1_24: P1.24 R5.1 | length 3.7
  Bottom Layer w0.152: P1.24@23.756,20.97 23.756,20.135 23.774,20.117 23.776,20.117 24.056,19.837 24.943,19.837 25.501,19.279 R5.1@25.501,18.542
NetP1_25: P1.25 R4.2 | length 3.6
  Bottom Layer w0.152: P1.25@22.756,20.97 22.756,20.068 23.012,19.812 23.65,19.812 24.63,18.833 R4.2@24.63,18.542
NetP1_31: P1.31 R39.8 | length 4
  Bottom Layer w0.152: R39.8@14.196,18.886 14.541,18.886 15.315,19.66 16.357,19.66 16.756,20.058 P1.31@16.756,20.97
NetP1_32: P1.32 R39.7 | length 3.3
  Bottom Layer w0.152: R39.7@13.696,18.886 13.696,19.158 14.045,19.507 14.732,19.507 15.756,20.531 P1.32@15.756,20.97
NetP1_33: P1.33 R39.6 | length 3.2
  Bottom Layer w0.152: R39.6@13.196,18.886 13.196,19.267 13.487,19.558 13.664,19.558 13.918,19.812 14.478,19.812 14.756,20.09 P1.33@14.756,20.97
NetP1_34: P1.34 R39.5 | length 2.7
  Bottom Layer w0.152: R39.5@12.696,18.886 12.696,19.402 13.157,19.863 13.538,19.863 13.756,20.081 P1.34@13.756,20.97
NetP1_36: P1.36 R39.4 | length 1.5
  Bottom Layer w0.152: 11.756,20.223 12.196,19.783 R39.4@12.196,18.886
NetP1_37: P1.37 R39.3 | length 2
  Bottom Layer w0.152: P1.37@10.756,20.511 11.696,19.571 R39.3@11.696,18.886
NetP1_38: P1.38 R39.2 | length 2.3
  Bottom Layer w0.152: P1.38@9.756,20.394 10.312,19.837 10.719,19.837 11.196,19.36 R39.2@11.196,18.886
NetP1_39: P1.39 R39.1 | length 3.6
  Bottom Layer w0.152: P1.39@8.756,20.97 8.756,20.073 9.322,19.507 10.465,19.507 10.696,19.276 R39.1@10.696,18.886
NetP2_9: P2.9 R6.2 | length 4.1
  Bottom Layer w0.381: R6.2@16.688,30.844 17.356,30.844 18.416,31.903 P2.9@18.416,33.797
NetR4_1: R4.1 U10.30 | length 17.2
  Top Layer w0.152: v2(22.403,3.302) 22.743,3.643 U10.30@23.544,3.643
  Bottom Layer w0.152: v2@22.301,3.378 22.301,5.757 24.72,8.176 24.753,8.176 26.894,10.317 26.894,14.167 24.638,16.423 R4.1@24.638,16.434
NetR5_2: R5.2 U10.32 | length 20.9
  Top Layer w0.152: v2(24.435,0.66) 24.409,0.686 24.409,2.261 24.794,2.646 U10.32@24.794,2.893
  Bottom Layer w0.152: v2(24.435,0.66) 23.393,1.702 23.393,6.419 24.846,7.871 24.879,7.871 27.199,10.191 27.199,14.293 25.509,15.983 R5.2@25.509,16.434
NetR6_1: R6.1 U8.4 U8.5 | length 7.4
  Top Layer w0.203: U8.4@9.405,32.337 9.405,31.87 10.007,31.267 10.973,31.267 11.405,31.7 ; U8.5@11.405,32.337 11.405,31.7 ; v2(13.944,30.632) 12.239,30.632 11.405,31.466 11.405,31.7
  Bottom Layer w0.203: v2(13.944,30.632) 14.148,30.836 R6.1@14.579,30.836
NetR7_3: R7.3 R9.2 | length 3.1
  Top Layer w0.33: R9.2@6.502,39.954 8.6,39.954 cw(c8.6,38.686) R7.3@9.497,39.583
NetR11_1: R11.1 U8.6 | length 1.2
  Top Layer w0.203: U8.6@11.405,32.837 11.961,32.837 R11.1@12.446,32.352
NetR12_2: R12.2 U10.1 | length 1.2
  Top Layer w0.203: U10.1@29.544,3.643 R12.2@30.703,3.643
NetR15_2: R15.2 U13.11 | length 1.3
  Top Layer w0.152: R15.2@15.113,61.062 15.379,60.796 U13.11@15.379,59.887
NetR21_2: R21.2 U15.1 | length 1
  Top Layer w0.254: U15.1@29.673,54.181 R21.2@30.654,54.181
NetR22_3: R22.3 R33.1 | length 1.5
  Top Layer w0.33: R33.1@6.528,43.383 7.975,43.383 R22.3@7.982,43.39
NetR24_1: R24.1 U16.13 | length 1.5
  Top Layer w0.152: U16.13@23.394,44.423 23.953,44.423 R24.1@24.629,43.747
NetR24_2: R24.2 R25.2 R37.2 | length 26.3
  Top Layer w0.152: R24.2@24.629,42.739 R25.2@25.536,42.739 ; R25.2@25.552,42.723 25.552,41.758 26.06,41.25 v2(28.65,41.25)
  Bottom Layer w0.152: R37.2@20.848,29.3 20.848,29.518 22.47,31.14 29.285,31.14 30.937,32.792 30.937,39.014 28.676,41.275 v2(28.65,41.25)
NetR37_1: R37.1 U16.12 | length 27.9
  Top Layer w0.152: U16.12@22.644,43.673 25.677,40.64 v2(28.194,40.64)
  Bottom Layer w0.152: R37.1@20.348,29.3 20.348,29.518 22.275,31.445 29.159,31.445 30.632,32.918 30.632,38.887 28.88,40.64 v2(28.194,40.64)
NetR37_3: R37.3 U16.14 | length 28.7
  Top Layer w0.152: U16.14@23.394,44.923 25.765,44.923 27.66,43.028 27.66,42.189 v2(28.118,41.732)
  Bottom Layer w0.152: R37.3@21.348,29.3 21.348,29.518 22.666,30.836 29.412,30.836 31.242,32.666 31.242,39.14 29.132,41.25 29.132,41.445 28.844,41.732 v2(28.118,41.732)
NetR37_4: R37.4 U16.15 | length 28.7
  Top Layer w0.152: U16.15@23.394,45.423 25.773,45.423 v2@28.803,42.393
  Bottom Layer w0.152: R37.4@21.848,29.3 21.848,29.518 22.861,30.531 29.538,30.531 31.547,32.54 31.547,39.266 29.437,41.376 29.437,41.571 28.971,42.037 28.803,42.037 v2(28.803,42.215)
NetR37_5: R37.5 U15.30 | length 36.3
  Top Layer w0.152: U15.30@23.673,54.181 23.546,54.053 23.546,52.263 24.196,51.613 24.358,51.613 26.441,49.53 26.441,45.618 v2(27.965,44.094)
  Bottom Layer w0.152: R37.5@22.348,29.3 22.348,29.518 23.056,30.226 29.664,30.226 31.851,32.413 31.851,39.392 29.742,41.502 29.742,41.953 27.965,43.73 v2(27.965,44.094)
NetR37_6: R37.6 U15.32 | length 34.9
  Top Layer w0.152: U15.32@24.923,53.431 24.923,53.009 24.765,52.85 24.765,51.714 26.923,49.556 26.923,46.33 v2(28.016,45.237)
  Bottom Layer w0.152: R37.6@22.848,29.3 22.848,29.518 23.251,29.921 29.79,29.921 32.156,32.287 32.156,39.519 30.277,41.398 30.277,42.012 28.6,43.688 28.6,44.653 v2(28.016,45.237)
NetR38_1: R38.1 U9.18 | length 14.2
  Top Layer w0.152: v2(3.145,37.791) 3.63,37.306 3.63,36.699 U9.18@3.706,36.623
  Bottom Layer w0.152: v2(3.145,37.791) 3.191,37.744 3.683,37.744 4.851,36.576 7.112,36.576 9.855,33.833 9.855,29.449 R38.1@9.832,29.427
NetR38_2: R38.2 U9.17 | length 14.8
  Top Layer w0.152: v2(3.606,38.252) 4.206,37.652 U9.17@4.206,36.623
  Bottom Layer w0.152: v2(3.606,38.252) 4.977,36.881 7.238,36.881 7.327,36.792 10.332,33.787 R38.2@10.332,29.427
NetR38_3: R38.3 U9.16 | length 15.8
  Top Layer w0.152: v2(4.068,38.713) 4.706,38.075 U9.16@4.706,36.623
  Bottom Layer w0.152: v2(4.068,38.713) 4.114,38.667 4.114,38.175 5.104,37.186 7.364,37.186 7.454,37.096 7.543,37.007 10.832,33.718 R38.3@10.832,29.427
NetR38_4: R38.4 U15.5 | length 62.8
  Top Layer w0.152: U15.5@29.673,56.181 29.673,56.145 30.164,56.145 30.502,55.807 31.677,55.807 32.08,56.21 32.08,60.35 v2(30.073,62.357)
  Bottom Layer w0.152: R38.4@11.332,29.427 11.332,30.476 11.201,30.607 11.201,61.186 14.073,64.057 14.162,64.147 14.251,64.236 14.341,64.325 14.709,64.694 27.737,64.694 v2(30.073,62.357)
NetR38_5: R38.5 U15.20 | length 51
  Top Layer w0.152: v2(24.206,64.11) 23.622,63.525 23.622,60.232 U15.20@24.423,59.431
  Bottom Layer w0.152: R38.5@11.832,29.427 11.832,30.536 11.506,30.862 11.506,61.059 14.288,63.842 14.378,63.931 14.467,64.02 14.556,64.11 v2(24.206,64.11)
NetR38_6: R38.6 U15.16 | length 53.8
  Top Layer w0.152: U15.16@26.423,59.431 26.423,59.937 26.488,60.002 26.488,61.32 27.729,62.56 v2(28.143,62.56)
  Bottom Layer w0.152: R38.6@12.319,29.44 12.319,30.48 11.811,30.988 11.811,60.933 11.836,60.959 11.887,61.009 14.504,63.626 14.593,63.716 14.682,63.805 23.774,63.805 25.019,62.56 v2(28.143,62.56)
NetR38_7: R38.7 U15.17 | length 49.2
  Top Layer w0.152: U15.17@25.923,59.431 25.923,60.493 v2(26.009,60.579)
  Bottom Layer w0.152: R38.7@12.878,29.472 12.878,30.455 12.116,31.217 12.116,60.807 12.141,60.832 14.719,63.411 14.809,63.5 23.292,63.5 26.009,60.782 v2(26.009,60.579)
NetR38_8: R38.8 U15.24 | length 50.1
  Top Layer w0.152: v2(21.183,56.49) 21.875,57.181 U15.24@23.673,57.181
  Bottom Layer w0.152: R38.8@13.335,29.429 13.335,30.556 12.42,31.471 12.42,60.681 14.935,63.195 19.761,63.195 21.183,61.773 v2(21.183,56.49)
NetR39_9: R39.9 U10.5 | length 27.4
  Top Layer w0.152: v2(26.365,11.379) 30.15,11.379 32.228,9.3 32.228,6.422 31.449,5.643 U10.5@29.544,5.643
  Bottom Layer w0.152: R39.9@14.196,17.386 14.196,17.309 20.253,11.252 v2@26.365,11.252
NetR39_10: R39.10 U10.16 | length 17.5
  Top Layer w0.152: U10.16@26.294,8.893 26.294,9.844 26.416,9.966 v2(26.416,10.719)
  Bottom Layer w0.152: R39.10@13.696,17.386 13.696,17.167 20.119,10.744 v2@26.416,10.744
NetR39_11: R39.11 U10.17 | length 17
  Top Layer w0.152: U10.17@25.794,8.893 v2@25.794,10.021
  Bottom Layer w0.152: R39.11@13.196,17.386 13.196,17.167 19.924,10.439 25.73,10.439 25.908,10.262 v2(25.908,10.135)
NetR39_12: R39.12 U10.20 | length 15.3
  Top Layer w0.152: v2(23.571,9.677) 24.294,8.954 U10.20@24.294,8.893
  Bottom Layer w0.152: R39.12@12.696,17.386 12.696,17.167 19.729,10.135 23.114,10.135 v2(23.571,9.677)
NetR39_13: R39.13 U10.24 | length 17.2
  Top Layer w0.152: v2(20.574,6.642) 21.864,6.642 21.881,6.643 U10.24@23.544,6.643
  Bottom Layer w0.152: R39.13@12.196,17.386 12.196,17.167 19.533,9.83 19.533,7.644 20.536,6.642 v2(20.574,6.642)
NetR39_14: R39.14 U6.9 U7.9 | length 17.7
  Top Layer w0.152: U7.9@7.592,17.202 v2@8.541,17.202 ; v2(8.687,17.348) 8.886,17.149 17.987,17.149 19.697,18.859 U6.9@20.712,18.859
  Bottom Layer w0.152: v2(8.687,17.348) 9.438,16.597 11.404,16.597 11.696,16.889 R39.14@11.696,17.386
NetR39_15: R39.15 U6.10 U7.10 | length 17.9
  Top Layer w0.152: U7.10@7.592,17.702 8.364,17.702 8.488,17.827 v2@9.3,17.827 ; v2(9.322,17.805) 9.673,17.454 17.606,17.454 v2(17.932,17.78) ; v2(18.008,16.612) 19.756,18.359 U6.10@20.712,18.359
  Bottom Layer w0.152: v2(9.322,17.805) 10.225,16.902 10.933,16.902 11.196,17.165 R39.15@11.196,17.386 ; v2(17.932,17.78) 17.932,16.688 v2(18.008,16.612)
NetR39_16: R39.16 U6.11 U7.11 | length 18.2
  Top Layer w0.152: U7.11@7.592,18.202 8.83,18.202 v2(9.22,18.593) 9.525,18.898 14.452,18.898 15.418,17.932 v2(16.865,17.932) ; v2(16.865,16.281) 17.014,16.133 18.207,16.133 19.932,17.859 U6.11@20.712,17.859
  Bottom Layer w0.152: v2(9.22,18.593) 10.427,17.386 R39.16@10.696,17.386 ; v2(16.865,16.281) v2(16.865,17.932)
OCM: C125.2 R26.1 R27.2 U16.1 U16.18 | length 11
  Top Layer w0.152: C125.2@17.364,46.567 17.72,46.923 U16.1@19.394,46.923 ; U16.18@23.394,46.923 23.504,46.923 23.825,47.244 ; v2(23.52,47.549) 23.825,47.244 ; R26.1@24.9,47.244 23.825,47.244
  Top Layer w0.254: R27.2@17.348,47.65 17.348,46.575 C125.2@17.356,46.567
  Bottom Layer w0.152: v2(18.085,46.914) 18.72,47.549 v2(23.52,47.549)
REF_IF_N: C72.1 U16.23 | length 8.4
  Top Layer w0.152: C72.1@16.129,52.688 16.129,52.357 15.887,52.116 15.887,50.927 17.97,48.844 20.133,48.844 20.644,48.333 U16.23@20.644,47.673
REF_IF_OUT_N: P2.16 U16.3 | length 9.2
  Top Layer w0.152: U16.3@19.394,45.923 19.068,45.923 19.021,45.969 18.694,45.969 18.516,45.792 18.516,42.393 20.472,40.437 20.498,40.437 v2(20.608,40.547)
  Bottom Layer w0.152: v2(20.608,40.547) 20.916,40.239 P2.16@20.916,38.797
REF_IF_OUT_P: P2.15 U16.2 | length 9.6
  Top Layer w0.152: U16.2@19.394,46.423 19.068,46.423 19.021,46.376 18.526,46.376 18.11,45.96 18.11,42.224 20.185,40.149 20.185,40.124 v2(20.075,40.014)
  Bottom Layer w0.152: P2.15@19.916,38.797 19.916,39.623 20.075,39.782 v2(20.075,40.014)
REF_IF_P: C78.1 U16.24 | length 8.3
  Top Layer w0.152: C78.1@15.24,52.688 15.24,52.357 15.481,52.116 15.481,50.759 17.802,48.438 19.964,48.438 20.144,48.258 U16.24@20.144,47.673
REFL_IF_N: C67.1 U16.19 | length 15.5
  Top Layer w0.152: v2(22.457,62.052) 22.457,62.571 22.525,62.638 C67.1@22.525,62.969 ; v2(22.555,49.53) 22.644,49.441 U16.19@22.644,47.673
  Bottom Layer w0.152: v2(22.457,62.052) 22.284,61.878 22.284,49.801 v2(22.555,49.53)
REFL_IF_OUT_N: P2.19 U16.16 | length 9.4
  Top Layer w0.152: U16.16@23.394,45.923 23.72,45.923 23.767,45.969 24.104,45.969 24.121,45.953 24.895,45.953 v2(24.942,46)
  Bottom Layer w0.152: P2.19@23.916,38.797 23.916,39.623 23.647,39.891 23.647,44.704 v2(24.942,46)
REFL_IF_OUT_P: P2.18 U16.17 | length 9.5
  Top Layer w0.152: U16.17@23.394,46.423 23.72,46.423 23.767,46.376 24.252,46.376 v2(24.409,46.533)
  Bottom Layer w0.152: P2.18@22.916,38.797 22.916,39.623 23.241,39.948 23.241,45.364 v2(24.409,46.533)
REFL_IF_P: C77.1 U16.20 | length 15.5
  Top Layer w0.152: C77.1@21.636,62.969 21.636,62.638 21.703,62.571 v2(21.703,62.052) ; v2(22.022,48.997) 22.144,48.875 U16.20@22.144,47.673
  Bottom Layer w0.152: v2(21.703,62.052) 21.877,61.878 21.877,49.142 v2(22.022,48.997)
SOURCE_REF_N: C51.1 P2.3 | length 31.2
  Top Layer w0.152: v1(24.409,33.122) 24.104,32.817 24.104,32.385 26.801,29.689 28.528,29.689 v2(28.854,29.362) ; C51.1@31.204,7.252 v2@31.915,7.252
  Bottom Layer w0.152: v2(28.854,29.362) 28.854,28.964 28.698,28.808 28.698,28.346 31.953,25.091 31.953,8.618 32.051,8.521 32.051,8.04 31.75,7.739 v2(31.75,7.29)
SOURCE_REF_P: C54.1 P2.4 | length 29.5
  Top Layer w0.152: v1(23.393,33.122) 23.698,32.817 23.698,32.217 26.755,29.159 v2@27.762,29.159 ; C54.1@31.204,7.811 31.47,8.077 v2(31.47,8.28)
  Bottom Layer w0.152: v2(27.762,29.108) 27.991,29.108 28.291,28.808 28.291,28.178 31.547,24.923 31.547,8.357 v2(31.47,8.28)
VCCSW: C5.2 FB2.2 FB3.2 FB4.2 FB5.1 U2.5 | length 10.7
  Top Layer w0.152: v2(3.05,29.797) FB4.2@3.432,29.797 ; FB3.2@11.684,16.053 15.062,16.053 v2(15.595,16.586)
  Top Layer w0.381: FB5.1@13.64,31.326 14.095,31.326 15.121,30.301 C5.2@15.121,30.086 16.132,30.086 U2.5@16.459,29.759
  Bottom Layer w0.152: v2(15.595,16.586) 15.875,16.866 v2(15.875,19.025)
  other v1: 15.418,29.87 14.656,30.048
VMIX_REF: C79.2 C81.2 C83.2 C85.2 C87.2 C89.2 C91.2 C93.2 C95.2 R13.2 R18.2 R29.2 R31.2 U13.7 U13.13 U13.18 U13.24 | length 17.9
  Top Layer w0.152: C81.2@13.614,60.808 C89.2@13.614,61.697 13.614,62.484 R18.2@14.097,62.967
  Top Layer w0.254: C81.2@13.614,60.808 13.614,59.651 U13.13@14.129,59.137 ; R29.2@14.097,54.585 C85.2@12.954,55.728 C93.2@12.954,56.617 12.974,56.637 U13.18@14.129,56.637 ; R31.2@17.272,54.585 18.034,54.585 C79.2@18.542,55.093 ; U13.24@17.379,55.887 17.379,55.494 17.78,55.093 C79.2@18.542,55.093 ; U13.7@17.379,59.887 17.379,60.153 18.161,60.935 C83.2@18.542,60.935 C91.2@18.542,61.824 ; R13.2@19.304,52.807 17.805,52.807 C95.2@17.78,52.832 18.542,53.594 C87.2@18.542,54.204 C79.2@18.542,55.093
  other v1: 17.348,52.375 17.297,53.162 18.085,53.213 13.233,55.397 12.954,56.172 13.614,61.189 18.491,61.544
VMIX_REFL: C80.2 C82.2 C84.2 C86.2 C88.2 C90.2 C92.2 C94.2 C96.2 R14.2 R20.2 R28.2 R30.2 U14.7 U14.13 U14.18 U14.24 | length 13.5
  Top Layer w0.254: C90.2@19.35,70.962 C92.2@19.35,70.073 19.35,69.956 19.989,69.956 U14.13@20.59,69.356 ; U14.18@20.59,66.856 19.764,66.856 v1(19.477,66.569) C82.2@19.477,66.263 C84.2@19.477,65.374 19.985,64.866 R28.2@20.62,64.866 ; R30.2@23.541,64.866 23.84,65.165 ; U14.24@23.84,66.106 23.84,65.165 ; U14.7@23.84,70.106 23.84,70.474 24.581,71.216 C86.2@24.684,71.216 ; C86.2@24.684,71.318 C88.2@24.684,72.105 ; C94.2@25.192,64.358 25.11,64.44 25.11,65.165 23.84,65.165 ; C96.2@27.305,70.46 28.205,70.46 R14.2@28.608,70.057
  other v1: 25.222,64.135 25.197,65.507 19.456,65.786 26.695,70.028 19.583,70.612 26.746,70.917 19.634,71.222 24.384,71.222 24.409,72.136 20.167,73.05
VSET_REF: C97.2 C99.2 R15.1 R17.2 R18.1 R32.1 U13.10 | length 16.7
  Top Layer w0.152: v2(15.062,70.561) 16.205,70.561 17.805,72.161 R32.1@18.347,72.161 ; R15.1@15.105,62.078 R18.1@15.105,62.967 ; v2(15.113,65.176) 15.105,65.168 R18.1@15.105,62.967 ; U13.10@15.879,59.887 15.879,60.583 16.129,60.833 C97.2@16.129,61.189 R17.2@16.129,62.078 C99.2@16.129,62.967 R18.1@15.105,62.967
  Bottom Layer w0.152: v2(15.062,70.561) 15.113,70.51 v2(15.113,65.176)
VSET_REFL: C98.2 C100.2 R16.1 R19.2 R20.1 R32.2 U14.10 | length 6.7
  Top Layer w0.152: R32.2@19.355,72.161 22.34,72.161 22.341,72.161 C98.2@22.398,72.105
  Top Layer w0.254: R20.1@21.501,72.994 C100.2@22.282,72.994 ; U14.10@22.34,70.106 22.34,72.161 C100.2@22.34,72.936
pads on no net: B1.2 P1.26 P1.27 P1.28 P1.29 R37.7 R37.8 R37.9 R37.10 U1.4 U2.4 U3.4 U10.28 U13.22 U14.22 U15.28

## Polygon pours and split planes (outlines as drawn)
GND on Bottom Layer "GND_L04_P004" (solid, remove dead copper, pour order 4): 0,0 -0.025,74.999 -0.009,74.999 32.659,74.999 32.659,0
GND on Top Layer "GND_L01_P003" (solid, remove dead copper, pour order 3): 0,0 -0.025,74.999 -0.009,74.999 32.659,74.999 32.659,0
VMIX_REFL on PWR (split plane): 27.265,63.794 18.632,63.794 18.632,74.489 27.265,74.489
3.3LO on PWR (split plane): 32.149,47.893 27.628,47.893 22.391,53.13 22.391,61.149 32.149,61.149
GND on PWR (split plane): 18.299,63.794 11.977,63.794 11.977,74.489 18.299,74.489
3.3Source on PWR (split plane): 32.149,0.51 19.826,0.51 19.826,10.476 32.149,10.476
5V-A on PWR (split plane): 32.149,61.482 22.225,61.482 22.182,61.476 22.142,61.46 22.107,61.433 22.081,61.399 22.064,61.359 22.058,61.316 22.058,53.061 22.061,53.039 22.064,53.018 22.076,52.989 22.081,52.977 22.107,52.943 27.441,47.609 27.461,47.594 27.476,47.582 27.492,47.575 27.516,47.566 27.559,47.56 32.149,47.56 32.149,26.354 26.786,26.354 26.786,31.242 26.786,40.234 26.78,40.277 26.763,40.317 26.737,40.351 26.702,40.378 26.662,40.394 26.619,40.4 11.977,40.4 11.977,51.421 18.923,51.421 18.966,51.427 19.006,51.443 19.041,51.47 19.067,51.504 19.084,51.544 19.089,51.587 19.089,63.46 27.432,63.46 27.475,63.466 27.515,63.483 27.55,63.509 27.576,63.544 27.593,63.584 27.598,63.627 27.598,74.489 32.149,74.489
GND on PWR (split plane): 11.644,40.234 11.65,40.191 11.667,40.15 11.693,40.116 11.728,40.089 11.768,40.073 11.811,40.067 26.452,40.067 26.452,31.409 18.658,31.409 18.658,35.382 18.652,35.425 18.635,35.465 18.609,35.5 18.574,35.526 18.534,35.543 18.491,35.549 0.499,35.549 0.486,74.489 11.644,74.489
VMIX_REF on PWR (split plane): 18.756,51.754 11.977,51.754 11.977,63.46 18.756,63.46
VCCSW on PWR (split plane): 18.324,18.683 15.025,18.683 15.025,29.007 15.02,29.05 15.003,29.09 14.977,29.125 14.942,29.151 14.902,29.168 14.859,29.173 0.501,29.173 0.499,35.216 18.324,35.216